# Altium PCB PCB1.PcbDoc
Units mm, origin at the board's own origin, x right, y up, seen from the top; angles counter-clockwise.
Board outline 99.31 x 102 mm, 2 copper layers (Top Layer, Bottom Layer); 134 components, 14 nets, 433 pads, 0 vias.
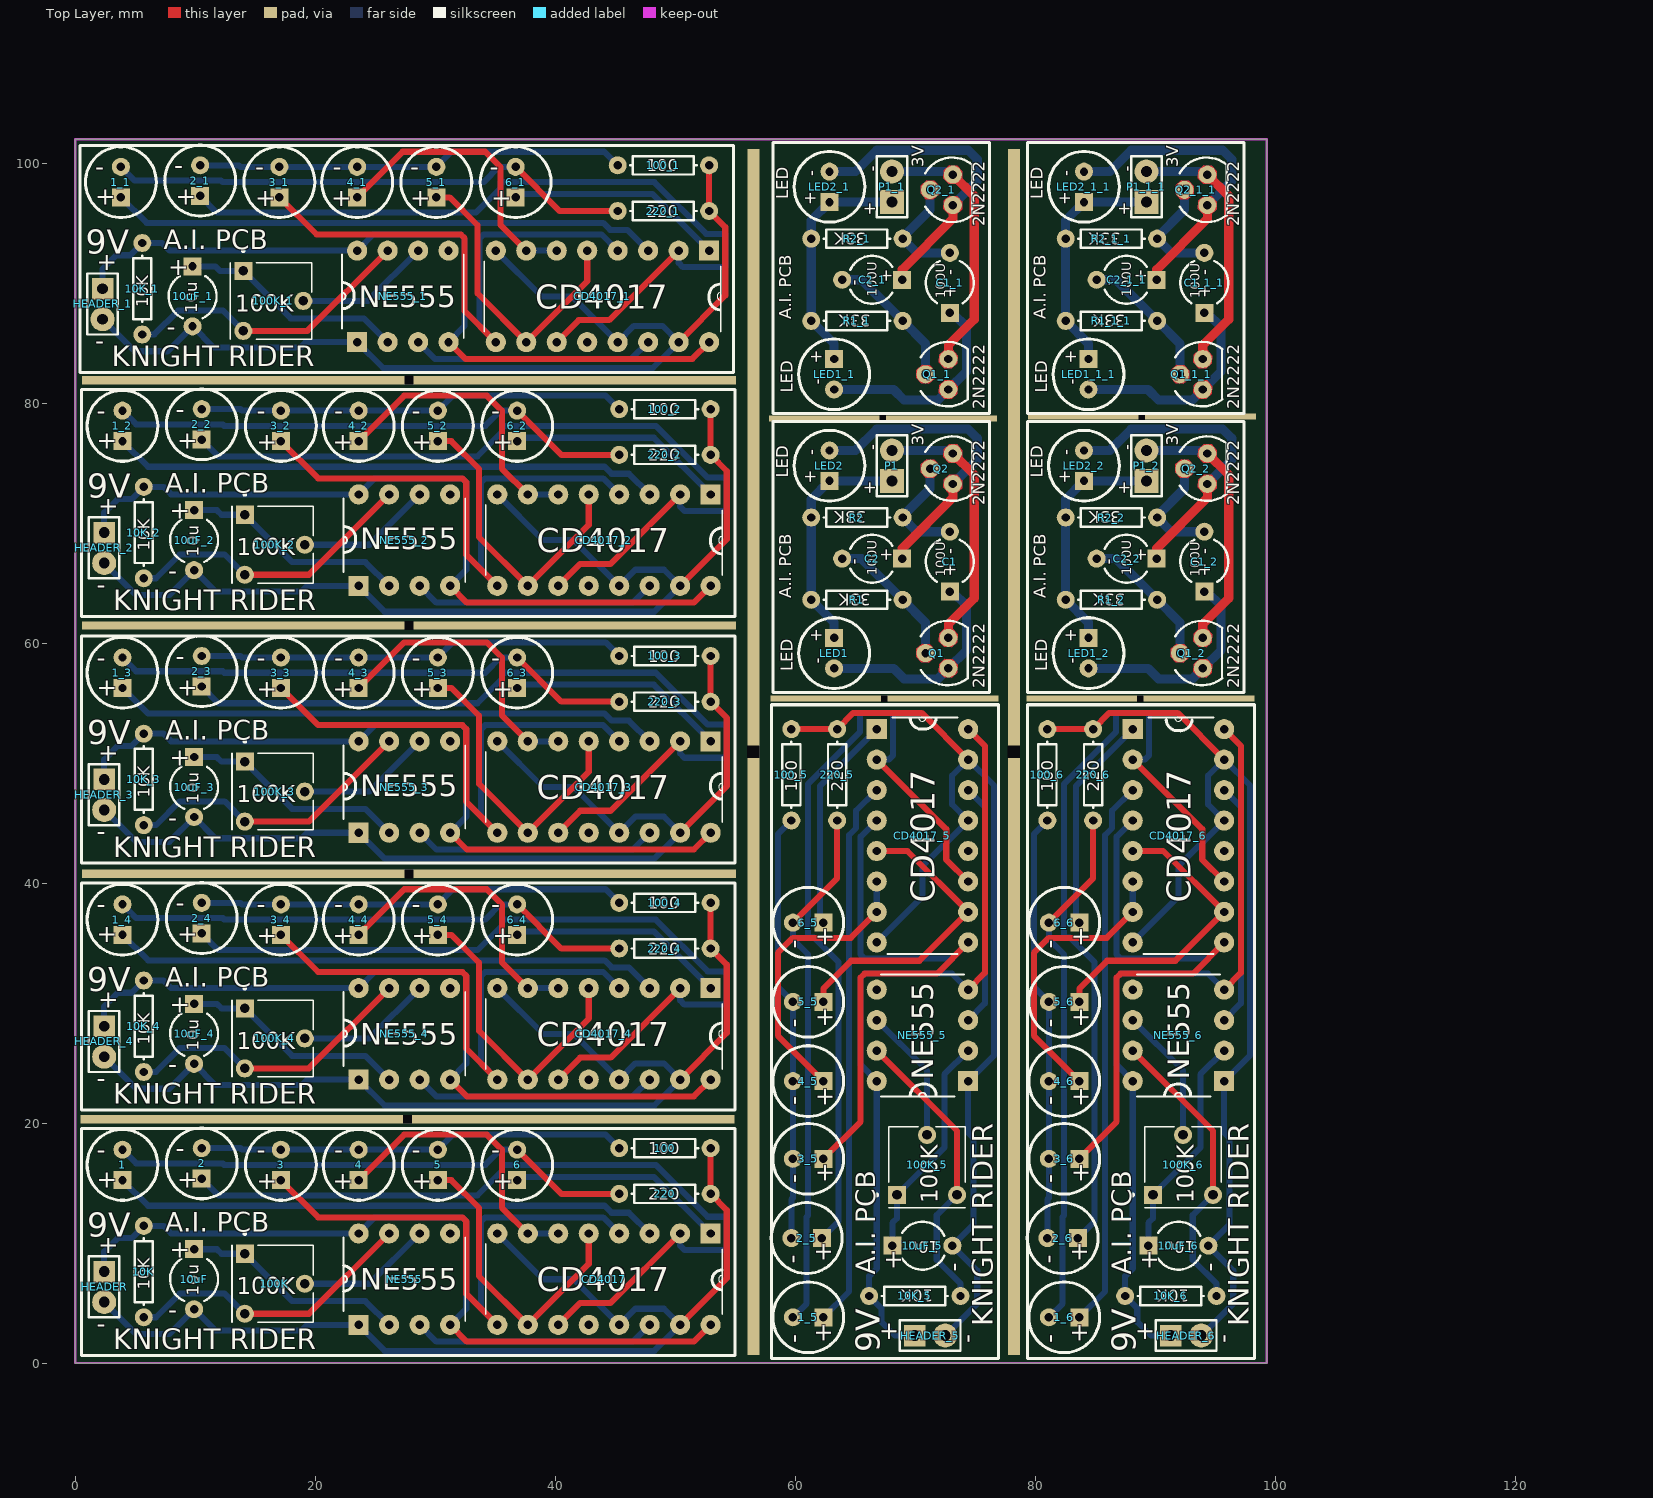
[diagram p0: Top Layer view]
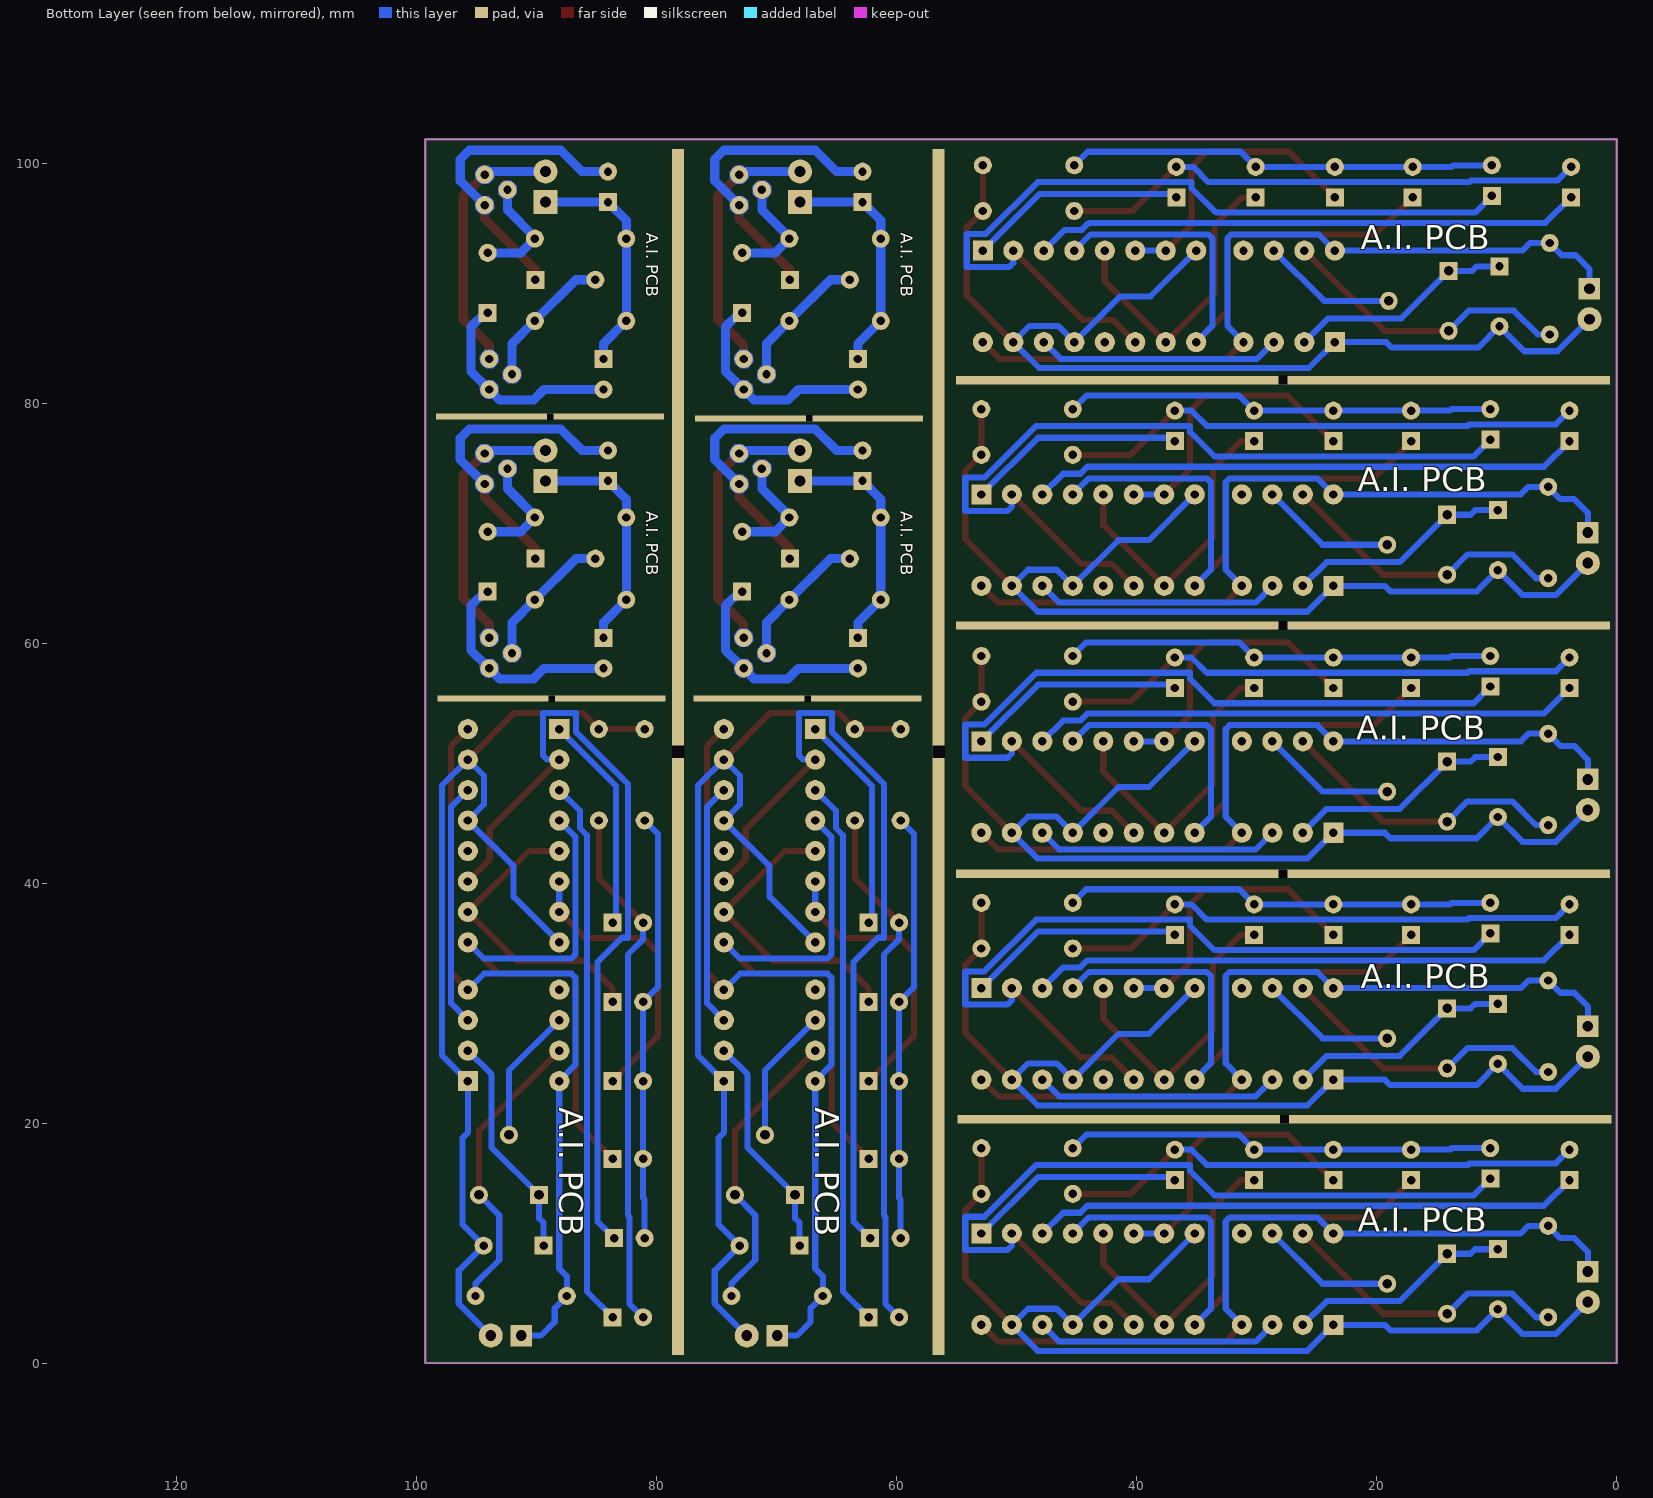
[diagram p1: Bottom Layer view, seen from below]

## Layer stack, top to bottom
Top Solder: solder mask 0.0102, Solder Resist, Dk 3.5
Top Layer: signal copper 0.0356
Dielectric 1: dielectric 0.32, FR-4, Dk 4.8
Bottom Layer: signal copper 0.0356
Bottom Solder: solder mask 0.0102, Solder Resist, Dk 3.5

## Board outline
0,0 0,102 99.314,102 99.314,0

## Design rules (kind name [scope] priority, off if disabled: settings)
Clearance [All] p1: gap=0.254 ignorepadtopadclearanceinfootprint=FALSE except(0: Arc-Hole Track-Hole SMDPad-Hole THPad-Hole Via-Hole Fill-Hole Poly-Hole Region-Hole Text-Hole)
PolygonConnect [All] p1: connectstyle=Relief reliefconductorwidth=0.254 reliefentries=4 polygonreliefangle="90 Angle" airgapwidth=0.254
RoutingVias [All] p1: holewidth=0.711 width=1.27 viastyle="Through Hole" minholewidth=0.711 minwidth=1.27 maxholewidth=0.711 maxwidth=1.27
SolderMaskExpansion [All] p1: expansion=0.102
Width [All] p1: maxlimit=0.762 minlimit=0.254 preferedwidth=0.508
30 further rules are at their usual default settings.

## Classes and differential pairs
component class Sheet1: 1 2 3 4 5 6 10K 10uF 100 100K 220 CD4017 HEADER NE555

## Components (designator, comment, footprint, x,y, rotation, side; value= is the part's Value field where it differs from the comment)
1 "L-53GD" L-53GD 3.937,16.51 r90 top
1_1 "L-53GD" L-53GD 3.81,98.425 r90 top (schematic designator 1)
1_2 "L-53GD" L-53GD 3.937,78.105 r90 top (schematic designator 1)
1_3 "L-53GD" L-53GD 3.937,57.531 r90 top (schematic designator 1)
1_4 "L-53GD" L-53GD 3.937,36.957 r90 top (schematic designator 1)
1_5 "L-53GD" L-53GD 61.087,3.81 r180 top (schematic designator 1)
1_6 "L-53GD" L-53GD 82.423,3.81 r180 top (schematic designator 1)
2 "L-53GD" L-53GD 10.541,16.637 r90 top
2_1 "L-53GD" L-53GD 10.414,98.552 r90 top (schematic designator 2)
2_2 "L-53GD" L-53GD 10.541,78.232 r90 top (schematic designator 2)
2_3 "L-53GD" L-53GD 10.541,57.658 r90 top (schematic designator 2)
2_4 "L-53GD" L-53GD 10.541,37.084 r90 top (schematic designator 2)
2_5 "L-53GD" L-53GD 60.96,10.414 r180 top (schematic designator 2)
2_6 "L-53GD" L-53GD 82.296,10.414 r180 top (schematic designator 2)
3 "L-53GD" L-53GD 17.145,16.51 r90 top
3_1 "L-53GD" L-53GD 17.018,98.425 r90 top (schematic designator 3)
3_2 "L-53GD" L-53GD 17.145,78.105 r90 top (schematic designator 3)
3_3 "L-53GD" L-53GD 17.145,57.531 r90 top (schematic designator 3)
3_4 "L-53GD" L-53GD 17.145,36.957 r90 top (schematic designator 3)
3_5 "L-53GD" L-53GD 61.087,17.018 r180 top (schematic designator 3)
3_6 "L-53GD" L-53GD 82.423,17.018 r180 top (schematic designator 3)
4 "L-53GD" L-53GD 23.622,16.51 r90 top
4_1 "L-53GD" L-53GD 23.495,98.425 r90 top (schematic designator 4)
4_2 "L-53GD" L-53GD 23.622,78.105 r90 top (schematic designator 4)
4_3 "L-53GD" L-53GD 23.622,57.531 r90 top (schematic designator 4)
4_4 "L-53GD" L-53GD 23.622,36.957 r90 top (schematic designator 4)
4_5 "L-53GD" L-53GD 61.087,23.495 r180 top (schematic designator 4)
4_6 "L-53GD" L-53GD 82.423,23.495 r180 top (schematic designator 4)
5 "L-53GD" L-53GD 30.226,16.51 r90 top
5_1 "L-53GD" L-53GD 30.099,98.425 r90 top (schematic designator 5)
5_2 "L-53GD" L-53GD 30.226,78.105 r90 top (schematic designator 5)
5_3 "L-53GD" L-53GD 30.226,57.531 r90 top (schematic designator 5)
5_4 "L-53GD" L-53GD 30.226,36.957 r90 top (schematic designator 5)
5_5 "L-53GD" L-53GD 61.087,30.099 r180 top (schematic designator 5)
5_6 "L-53GD" L-53GD 82.423,30.099 r180 top (schematic designator 5)
6 "L-53GD" L-53GD 36.83,16.51 r90 top
6_1 "L-53GD" L-53GD 36.703,98.425 r90 top (schematic designator 6)
6_2 "L-53GD" L-53GD 36.83,78.105 r90 top (schematic designator 6)
6_3 "L-53GD" L-53GD 36.83,57.531 r90 top (schematic designator 6)
6_4 "L-53GD" L-53GD 36.83,36.957 r90 top (schematic designator 6)
6_5 "L-53GD" L-53GD 61.087,36.703 r180 top (schematic designator 6)
6_6 "L-53GD" L-53GD 82.423,36.703 r180 top (schematic designator 6)
10K "Res1" AXIAL-0.3 5.715,7.62 r90 top value=1K
10K_1 "Res1" AXIAL-0.3 5.588,89.535 r90 top value=1K (schematic designator 10K)
10K_2 "Res1" AXIAL-0.3 5.715,69.215 r90 top value=1K (schematic designator 10K)
10K_3 "Res1" AXIAL-0.3 5.715,48.641 r90 top value=1K (schematic designator 10K)
10K_4 "Res1" AXIAL-0.3 5.715,28.067 r90 top value=1K (schematic designator 10K)
10K_5 "Res1" AXIAL-0.3 69.977,5.588 r180 top value=1K (schematic designator 10K)
10K_6 "Res1" AXIAL-0.3 91.313,5.588 r180 top value=1K (schematic designator 10K)
10uF "Cap2" CAPR5-4X5 9.906,6.985 r270 top value=10uF
10uF_1 "Cap2" CAPR5-4X5 9.779,88.9 r270 top value=10uF (schematic designator 10uF)
10uF_2 "Cap2" CAPR5-4X5 9.906,68.58 r270 top value=10uF (schematic designator 10uF)
10uF_3 "Cap2" CAPR5-4X5 9.906,48.006 r270 top value=10uF (schematic designator 10uF)
10uF_4 "Cap2" CAPR5-4X5 9.906,27.432 r270 top value=10uF (schematic designator 10uF)
10uF_5 "Cap2" CAPR5-4X5 70.612,9.779 r0 top value=10uF (schematic designator 10uF)
10uF_6 "Cap2" CAPR5-4X5 91.948,9.779 r0 top value=10uF (schematic designator 10uF)
100 "Res1" AXIAL-0.3 49.149,17.907 r180 top value=1K
100_1 "Res1" AXIAL-0.3 49.022,99.822 r180 top value=1K (schematic designator 100)
100_2 "Res1" AXIAL-0.3 49.149,79.502 r180 top value=1K (schematic designator 100)
100_3 "Res1" AXIAL-0.3 49.149,58.928 r180 top value=1K (schematic designator 100)
100_4 "Res1" AXIAL-0.3 49.149,38.354 r180 top value=1K (schematic designator 100)
100_5 "Res1" AXIAL-0.3 59.69,49.022 r270 top value=1K (schematic designator 100)
100_6 "Res1" AXIAL-0.3 81.026,49.022 r270 top value=1K (schematic designator 100)
100K "EVN-D8AA03B14" *TRIM_EVN-D8AA03B14 16.637,6.604 r270 top
100K_1 "EVN-D8AA03B14" *TRIM_EVN-D8AA03B14 16.51,88.519 r270 top (schematic designator 100K)
100K_2 "EVN-D8AA03B14" *TRIM_EVN-D8AA03B14 16.637,68.199 r270 top (schematic designator 100K)
100K_3 "EVN-D8AA03B14" *TRIM_EVN-D8AA03B14 16.637,47.625 r270 top (schematic designator 100K)
100K_4 "EVN-D8AA03B14" *TRIM_EVN-D8AA03B14 16.637,27.051 r270 top (schematic designator 100K)
100K_5 "EVN-D8AA03B14" *TRIM_EVN-D8AA03B14 70.993,16.51 r0 top (schematic designator 100K)
100K_6 "EVN-D8AA03B14" *TRIM_EVN-D8AA03B14 92.329,16.51 r0 top (schematic designator 100K)
220 "Res1" AXIAL-0.3 49.149,14.097 r180 top value=1K
220_1 "Res1" AXIAL-0.3 49.022,96.012 r180 top value=1K (schematic designator 220)
220_2 "Res1" AXIAL-0.3 49.149,75.692 r180 top value=1K (schematic designator 220)
220_3 "Res1" AXIAL-0.3 49.149,55.118 r180 top value=1K (schematic designator 220)
220_4 "Res1" AXIAL-0.3 49.149,34.544 r180 top value=1K (schematic designator 220)
220_5 "Res1" AXIAL-0.3 63.5,49.022 r270 top value=1K (schematic designator 220)
220_6 "Res1" AXIAL-0.3 84.836,49.022 r270 top value=1K (schematic designator 220)
C1 "Cap1" CAPR5-4X5 72.898,66.786 r90 top value=100uF
C1_1 "Cap1" CAPR5-4X5 72.898,90.027 r90 top value=100uF (schematic designator C1)
C1_1_1 "Cap1" CAPR5-4X5 94.107,90.027 r90 top value=100uF (schematic designator C1)
C1_2 "Cap1" CAPR5-4X5 94.107,66.786 r90 top value=100uF (schematic designator C1)
C2 "Cap2" CAPR5-4X5 66.421,67.04 r180 top value=100uF
C2_1 "Cap2" CAPR5-4X5 66.421,90.281 r180 top value=100uF (schematic designator C2)
C2_1_1 "Cap2" CAPR5-4X5 87.63,90.281 r180 top value=100uF (schematic designator C2)
C2_2 "Cap2" CAPR5-4X5 87.63,67.04 r180 top value=100uF (schematic designator C2)
CD4017 "CD4017BE" *DIP254P762X508-16 35.179,3.175 r270 top
CD4017_1 "CD4017BE" *DIP254P762X508-16 35.052,85.09 r270 top (schematic designator CD4017)
CD4017_2 "CD4017BE" *DIP254P762X508-16 35.179,64.77 r270 top (schematic designator CD4017)
CD4017_3 "CD4017BE" *DIP254P762X508-16 35.179,44.196 r270 top (schematic designator CD4017)
CD4017_4 "CD4017BE" *DIP254P762X508-16 35.179,23.622 r270 top (schematic designator CD4017)
CD4017_5 "CD4017BE" *DIP254P762X508-16 74.422,35.052 r0 top (schematic designator CD4017)
CD4017_6 "CD4017BE" *DIP254P762X508-16 95.758,35.052 r0 top (schematic designator CD4017)
HEADER "Header 2" HDR1X2#1 2.413,7.62 r270 top
HEADER_1 "Header 2" HDR1X2#1 2.286,89.535 r270 top (schematic designator HEADER)
HEADER_2 "Header 2" HDR1X2#1 2.413,69.215 r270 top (schematic designator HEADER)
HEADER_3 "Header 2" HDR1X2#1 2.413,48.641 r270 top (schematic designator HEADER)
HEADER_4 "Header 2" HDR1X2#1 2.413,28.067 r270 top (schematic designator HEADER)
HEADER_5 "Header 2" HDR1X2#1 69.977,2.286 r0 top (schematic designator HEADER)
HEADER_6 "Header 2" HDR1X2#1 91.313,2.286 r0 top (schematic designator HEADER)
LED1 "L-53GD" L-53GD 63.246,59.166 r270 top
LED1_1 "L-53GD" L-53GD 63.246,82.407 r270 top (schematic designator LED1)
LED1_1_1 "L-53GD" L-53GD 84.455,82.407 r270 top (schematic designator LED1)
LED1_2 "L-53GD" L-53GD 84.455,59.166 r270 top (schematic designator LED1)
LED2 "L-53GD" L-53GD 62.865,74.787 r90 top
LED2_1 "L-53GD" L-53GD 62.865,98.028 r90 top (schematic designator LED2)
LED2_1_1 "L-53GD" L-53GD 84.074,98.028 r90 top (schematic designator LED2)
LED2_2 "L-53GD" L-53GD 84.074,74.787 r90 top (schematic designator LED2)
NE555 "NE555N" *DIP254P762X533-8 31.242,10.795 r90 top
NE555_1 "NE555N" *DIP254P762X533-8 31.115,92.71 r90 top (schematic designator NE555)
NE555_2 "NE555N" *DIP254P762X533-8 31.242,72.39 r90 top (schematic designator NE555)
NE555_3 "NE555N" *DIP254P762X533-8 31.242,51.816 r90 top (schematic designator NE555)
NE555_4 "NE555N" *DIP254P762X533-8 31.242,31.242 r90 top (schematic designator NE555)
NE555_5 "NE555N" *DIP254P762X533-8 66.802,31.115 r180 top (schematic designator NE555)
NE555_6 "NE555N" *DIP254P762X533-8 88.138,31.115 r180 top (schematic designator NE555)
P1 "Header 2" HDR1X2#2 68.072,73.517 r90 top
P1_1 "Header 2" HDR1X2#2 68.072,96.758 r90 top (schematic designator P1)
P1_1_1 "Header 2" HDR1X2#2 89.281,96.758 r90 top (schematic designator P1)
P1_2 "Header 2" HDR1X2#2 89.281,73.517 r90 top (schematic designator P1)
Q1 "P2N2222A" *TO92 72.771,59.166 r90 top
Q1_1 "P2N2222A" *TO92 72.771,82.407 r90 top (schematic designator Q1)
Q1_1_1 "P2N2222A" *TO92 93.98,82.407 r90 top (schematic designator Q1)
Q1_2 "P2N2222A" *TO92 93.98,59.166 r90 top (schematic designator Q1)
Q2 "P2N2222A" *TO92 73.152,74.533 r90 top
Q2_1 "P2N2222A" *TO92 73.152,97.774 r90 top (schematic designator Q2)
Q2_1_1 "P2N2222A" *TO92 94.361,97.774 r90 top (schematic designator Q2)
Q2_2 "P2N2222A" *TO92 94.361,74.533 r90 top (schematic designator Q2)
R1 "Res1" AXIAL-0.3 65.151,63.611 r180 top value=33K
R1_1 "Res1" AXIAL-0.3 65.151,86.852 r180 top value=33K (schematic designator R1)
R1_1_1 "Res1" AXIAL-0.3 86.36,86.852 r180 top value=33K (schematic designator R1)
R1_2 "Res1" AXIAL-0.3 86.36,63.611 r180 top value=33K (schematic designator R1)
R2 "Res1" AXIAL-0.3 65.151,70.469 r180 top value=33K
R2_1 "Res1" AXIAL-0.3 65.151,93.71 r180 top value=33K (schematic designator R2)
R2_1_1 "Res1" AXIAL-0.3 86.36,93.71 r180 top value=33K (schematic designator R2)
R2_2 "Res1" AXIAL-0.3 86.36,70.469 r180 top value=33K (schematic designator R2)

## Footprints (in the part's own frame and the unit in brackets; to place one, negate y for a bottom-side part, rotate by r counter-clockwise, add the part's x,y. Pads: shape width x height; smd on the part's side, far side on the other; paste and mask are expansions set on the pad)
*DIP254P762X508-16 [mil]
  rect 66x66 hole 27.56: 1(-300,700)
  round 66 hole 27.56: 2(-300,600) 3(-300,500) 4(-300,400) 5(-300,300) 6(-300,200) 7(-300,100) 8(-300,0) 9(0,0) 10(0,100) 11(0,200) 12(0,300) 13(0,400) 14(0,500) 15(0,600) 16(0,700)
  silkscreen extent -265,-38 -35,738
*DIP254P762X533-8 [mil]
  rect 66x66 hole 27.56: 1(-300,300)
  round 66 hole 27.56: 2(-300,200) 3(-300,100) 4(-300,0) 5(0,0) 6(0,100) 7(0,200) 8(0,300)
  silkscreen extent -287,-50 -13,350
*TO92 [mm]
  round 1.5 hole 0.7: 1(1.27,0) 2(0,1.905) 3(-1.27,0)
  Top Layer region: -0.482,0.287 -0.916,0.76 -1.557,0.788 -2.03,0.354 -2.058,-0.287 -1.624,-0.76 -0.983,-0.788 -0.51,-0.354
  Top Layer region: 0.788,2.192 0.354,2.665 -0.287,2.693 -0.76,2.259 -0.788,1.618 -0.354,1.145 0.287,1.117 0.76,1.551
  Top Layer region: 2.058,0.287 1.624,0.76 0.983,0.788 0.51,0.354 0.482,-0.287 0.916,-0.76 1.557,-0.788 2.03,-0.354
  Bottom Layer region: -0.482,0.287 -0.916,0.76 -1.557,0.788 -2.03,0.354 -2.058,-0.287 -1.624,-0.76 -0.983,-0.788 -0.51,-0.354
  Bottom Layer region: 0.788,2.192 0.354,2.665 -0.287,2.693 -0.76,2.259 -0.788,1.618 -0.354,1.145 0.287,1.117 0.76,1.551
  Bottom Layer region: 2.058,0.287 1.624,0.76 0.983,0.788 0.51,0.354 0.482,-0.287 0.916,-0.76 1.557,-0.788 2.03,-0.354
  Multi-Layer region: -0.482,0.287 -0.916,0.76 -1.557,0.788 -2.03,0.354 -2.058,-0.287 -1.624,-0.76 -0.983,-0.788 -0.51,-0.354
  Multi-Layer region: 0.788,2.192 0.354,2.665 -0.287,2.693 -0.76,2.259 -0.788,1.618 -0.354,1.145 0.287,1.117 0.76,1.551
  Multi-Layer region: 2.058,0.287 1.624,0.76 0.983,0.788 0.51,0.354 0.482,-0.287 0.916,-0.76 1.557,-0.788 2.03,-0.354
  silkscreen extent -2.68,-1.61 2.7,2.3
*TRIM_EVN-D8AA03B14 [mm]
  rect 1.508x1.508 hole 0.8: 1(-2.5,-2.5)
  round 1.508 hole 0.8: 2(0,2.5) 3(2.5,-2.5)
  silkscreen extent -4.3,-3.57 3.2,3.2
AXIAL-0.3 [mm] "Axial Device, Thru-Hole; 2 Leads; 0.3 in Pin Spacing"
  round 1.5 hole 0.7: 1(-3.81,0) 2(3.81,0)
  silkscreen extent -2.77,-0.76 2.77,0.76
CAPR5-4X5 [mm] "Capacitor; 2 Leads"
  rect 1.5x1.5 hole 0.7: 1(-2.5,0)
  round 1.5 hole 0.7: 2(2.5,0)
  silkscreen extent -1.69,-2 1.82,2
HDR1X2#1 [mm] "Connector; Header; 2 Position"
  rect 1.8x1.8 hole 0.9: 1(0,0)
  round 2 hole 0.9: 2(2.54,0)
  silkscreen extent -1.27,-1.27 3.81,1.27
HDR1X2#2 [mm] "Connector; Header; 2 Position"
  rect 2x2 hole 0.9: 1(0,0)
  round 2 hole 0.9: 2(2.54,0)
  silkscreen extent -1.27,-1.27 3.81,1.27
L-53GD [mm]
  rect 1.5x1.5 hole 0.7: 1(-1.27,0)
  round 1.5 hole 0.7: 2(1.27,0)
  silkscreen extent -2.95,-2.95 2.95,2.95

## Part data
1 1_1 1_2 1_3 1_4 1_5 1_6 2 2_1 2_2 2_3 2_4 2_5 2_6 3 3_1 3_2 3_3 3_4 3_5 3_6 4 4_1 4_2 4_3 4_4 4_5 4_6 5 5_1 5_2 5_3 5_4 5_5 5_6 6 6_1 6_2 6_3 6_4 6_5 6_6 LED1 LED1_1 LED1_1_1 LED1_2 LED2 LED2_1 LED2_1_1 LED2_2: "LED", Manufacturer_Name=Kingbright, Mouser Part Number=N/A, RS Part Number=2286004A, Allied_Number=70424261, Allied Price/Stock=http://www.alliedelec.com/kingbright-l-53gd/70424261/, Datasheet Link=http://docs-emea.rs-online.com/webdocs/151e/0900766b8151e408.pdf, Manufacturer_Part_Number=L-53GD, Mouser Price/Stock=https://www.mouser.com/Search/Refine.aspx?Keyword=N%2FA, RS Price/Stock=http://uk.rs-online.com/web/p/products/2286004A
10K 10K_1 10K_2 10K_3 10K_4 10K_5 10K_6 100 100_1 100_2 100_3 100_4 100_5 100_6 220 220_1 220_2 220_3 220_4 220_5 220_6 R1 R1_1 R1_1_1 R1_2 R2 R2_1 R2_1_1 R2_2: "Resistor", LatestRevisionDate=17-Jul-2002, LatestRevisionNote="Re-released for DXP Platform.", PackageDescription="Axial Device, Thru-Hole; 2 Leads; 0.3 in Pin Spacing", PackageReference=AXIAL-0.3, Published=8-Jun-2000, Publisher="Altium Limited"
10uF 10uF_1 10uF_2 10uF_3 10uF_4 10uF_5 10uF_6 C2 C2_1 C2_1_1 C2_2: "Capacitor", PackageDescription="Capacitor; 2 Leads", PackageReference=CAPR5-4X5, Published=23-Sep-2002, Publisher="Altium Limited"
100K 100K_1 100K_2 100K_3 100K_4 100K_5 100K_6: "Trimmer; Carbon; Rest 10 Kilohms; PCB; 1 Turn; Pwr-Rtg 0.1 W; Linear; Top Adj; 6 mm SQ", Package="PQFP-44 Panasonic", Availability=Unavailable, MF="Panasonic Electronic", MP=EVN-D8AA03B14, Price=None, SnapEDA_Link=https://www.snapeda.com/parts/EVN-D8AA03B14/Panasonic%20Electronic%20Components/view-part/?ref=snap
C1 C1_1 C1_1_1 C1_2: library part Cap2, "Capacitor", PackageDescription="Capacitor; 2 Leads", PackageReference=CAPR5-4X5, Published=23-Sep-2002, Publisher="Altium Limited"
CD4017 CD4017_1 CD4017_2 CD4017_3 CD4017_4 CD4017_5 CD4017_6: "IC Mos 4017/CD4017BE HARRIS", Package="DIP-16 Intersil", Availability=Unavailable, MF=Texas, MP=CD4017BE, Price=None, SnapEDA_Link=https://www.snapeda.com/parts/CD4017BE/Texas%20Instruments/view-part/?ref=snap
HEADER HEADER_1 HEADER_2 HEADER_3 HEADER_4 HEADER_5 HEADER_6 P1 P1_1 P1_1_1 P1_2: "Header, 2-Pin", LatestRevisionDate=17-Jul-2002, LatestRevisionNote="Re-released for DXP Platform.", Publisher="Altium Limited"
NE555 NE555_1 NE555_2 NE555_3 NE555_4 NE555_5 NE555_6: Package="DIP-8 Texas Instruments", Availability=Unavailable, MF="ON Semiconductor", MP=NE555N, Price=None, SnapEDA_Link=https://www.snapeda.com/parts/NE555N/ON%20Semiconductor/view-part/?ref=snap
Q1 Q1_1 Q1_1_1 Q1_2 Q2 Q2_1 Q2_1_1 Q2_2: Package="TO-92 NXP Semiconductors", Availability=Unavailable, MF="ON Semiconductor", MP=P2N2222A, Price=None, SnapEDA_Link=https://www.snapeda.com/parts/P2N2222A/ON%20Semiconductor/view-part/?ref=snap

## Free pads (board coordinates)
  rect 1x100.5 hole 1 square: 3(56.515,50.927) 3(78.232,50.927)
  rect 54.5x0.7 hole 0.7 square: 4(27.686,20.32) 4(27.813,40.767) 4(27.813,61.468) 4(27.813,81.915)
  rect 19x0.5 hole 0.5 square: 5(67.31,78.74) 5(67.437,55.372) 5(88.773,55.372) 5(88.9,78.867)

## Nets (pads, with @x,y where several pads share a name; then routed paths per layer and width w, separated by ;. In a path a pad name is that pad's centre, name@x,y a point inside that pad or via, vN(x,y) a via of type N, cw(c..) or ccw(c..) an arc to the next point about the centre after c; other vN are vias at no path point)
Net1_1: 1.1 CD4017.3 | length 45.8
  Bottom Layer w0.508: 1.1 6.071,13.106 44.12,13.106 44.704,12.522 46.152,12.522 CD4017.3
Net1_2: 1.2 6.2 220.2 | length 44
  Top Layer w0.508: 6.2 40.513,14.097 220.2
  Bottom Layer w0.508: 1.2 5.08,16.637 12.294,16.637 12.421,16.51 34.175,16.51 35.445,17.78 6.2
Net2_1: 2.1 CD4017.2 CD4017.11 | length 68.6
  Top Layer w0.508: CD4017.11 42.088,5.004 44.628,5.004 CD4017.2
  Bottom Layer w0.508: 2.1 11.938,13.97 33.528,13.97 35.572,16.014 35.572,16.51 48.387,16.51 52.705,12.192 54.305,12.192 54.305,9.423 50.775,9.423 50.419,9.779 CD4017.2
Net2_2: 2.2 3.2 4.2 5.2 100.2 | length 35.8
  Bottom Layer w0.508: 2.2 13.767,17.907 13.894,17.78 3.2 4.2 5.2 31.484,19.038 44.208,19.038 100.2
Net3_1: 3.1 CD4017.4 CD4017.9 | length 48
  Top Layer w0.508: 3.1 20.244,12.141 32.258,12.141 32.588,11.811 32.588,5.766 CD4017.9
  Bottom Layer w0.508: CD4017.9 33.833,4.521 33.833,11.811 34.163,12.141 43.993,12.141 CD4017.4
Net4_1: 4.1 CD4017.6 CD4017.7 | length 24.5
  Top Layer w0.508: 4.1 27.42,19.038 34.302,19.038 35.56,17.78 35.56,12.954 CD4017.7
  Bottom Layer w0.508: CD4017.7 CD4017.6
Net5_1: 5.1 CD4017.5 CD4017.10 | length 25.5
  Top Layer w0.508: 5.1 31.338,15.24 33.655,12.923 33.655,7.239 CD4017.10 42.799,8.255 CD4017.5
Net6_1: 6.1 CD4017.1 | length 18.2
  Bottom Layer w0.508: 6.1 37.109,15.519 48.235,15.519 CD4017.1
Net10K_1: 10K.1 100K.3 NE555.7 | length 24.7
  Top Layer w0.508: 100K.3 19.471,4.104 NE555.7
  Bottom Layer w0.508: 10K.1 6.731,3.81 8.712,5.791 12.45,5.791 100K.3
Net10K_2: 10K.2 CD4017.16 HEADER.1 NE555.4 NE555.8 | length 65.7
  Top Layer w0.508: NE555.4 32.639,1.778 51.562,1.778 CD4017.16
  Bottom Layer w0.508: HEADER.1 2.413,9.271 3.556,10.414 4.699,10.414 10K.2 7.366,11.43 8.001,10.795 NE555.8 24.968,12.141 32.258,12.141 32.588,11.811 32.588,4.521 NE555.4
Net10uF_1: 10uF.1 100K.1 NE555.2 | length 18.9
  Bottom Layer w0.508: 10uF.1 11.811,9.485 12.192,9.104 100K.1 18.085,5.156 24.181,5.156 NE555.2
Net10uF_2: 10uF.2 100.1 220.1 CD4017.8 CD4017.13 CD4017.15 HEADER.2 NE555.1 | length 89.1
  Top Layer w0.508: CD4017.15 54.305,7.061 54.305,12.751 220.1 100.1
  Bottom Layer w0.508: HEADER.2 5.08,2.413 7.834,2.413 10uF.2 11.673,2.718 18.872,2.718 19.329,3.175 NE555.1 25.781,1.016 48.26,1.016 CD4017.15 49.073,4.521 46.685,4.521 CD4017.13 41.529,6.985 38.989,6.985 CD4017.8
Net100K_2: 100K.2 NE555.6 | length 11.3
  Bottom Layer w0.508: 100K.2 24.511,6.604 NE555.6
NetCD4017_14: CD4017.14 NE555.3 | length 20.3
  Bottom Layer w0.508: NE555.3 30.099,1.778 46.482,1.778 CD4017.14
pads on no net: 1_1.1 1_1.2 1_2.1 1_2.2 1_3.1 1_3.2 1_4.1 1_4.2 1_5.1 1_5.2 1_6.1 1_6.2 2_1.1 2_1.2 2_2.1 2_2.2 2_3.1 2_3.2 2_4.1 2_4.2 2_5.1 2_5.2 2_6.1 2_6.2 3_1.1 3_1.2 3_2.1 3_2.2 3_3.1 3_3.2 3_4.1 3_4.2 3_5.1 3_5.2 3_6.1 3_6.2 4_1.1 4_1.2 4_2.1 4_2.2 4_3.1 4_3.2 4_4.1 4_4.2 4_5.1 4_5.2 4_6.1 4_6.2 5_1.1 5_1.2 5_2.1 5_2.2 5_3.1 5_3.2 5_4.1 5_4.2 5_5.1 5_5.2 5_6.1 5_6.2 6_1.1 6_1.2 6_2.1 6_2.2 6_3.1 6_3.2 6_4.1 6_4.2 6_5.1 6_5.2 6_6.1 6_6.2 10K_1.1 10K_1.2 10K_2.1 10K_2.2 10K_3.1 10K_3.2 10K_4.1 10K_4.2 10K_5.1 10K_5.2 10K_6.1 10K_6.2 10uF_1.1 10uF_1.2 10uF_2.1 10uF_2.2 10uF_3.1 10uF_3.2 10uF_4.1 10uF_4.2 10uF_5.1 10uF_5.2 10uF_6.1 10uF_6.2 100_1.1 100_1.2 100_2.1 100_2.2 100_3.1 100_3.2 100_4.1 100_4.2 100_5.1 100_5.2 100_6.1 100_6.2 100K_1.1 100K_1.2 100K_1.3 100K_2.1 100K_2.2 100K_2.3 100K_3.1 100K_3.2 100K_3.3 100K_4.1 100K_4.2 100K_4.3 100K_5.1 100K_5.2 100K_5.3 100K_6.1 100K_6.2 100K_6.3 220_1.1 220_1.2 220_2.1 220_2.2 220_3.1 220_3.2 220_4.1 220_4.2 220_5.1 220_5.2 220_6.1 220_6.2 C1.1 C1.2 C1_1.1 C1_1.2 C1_1_1.1 C1_1_1.2 C1_2.1 C1_2.2 C2.1 C2.2 C2_1.1 C2_1.2 C2_1_1.1 C2_1_1.2 C2_2.1 C2_2.2 CD4017.12 CD4017_1.1 CD4017_1.2 CD4017_1.3 CD4017_1.4 CD4017_1.5 CD4017_1.6 CD4017_1.7 CD4017_1.8 CD4017_1.9 CD4017_1.10 CD4017_1.11 CD4017_1.12 CD4017_1.13 CD4017_1.14 CD4017_1.15 CD4017_1.16 CD4017_2.1 CD4017_2.2 CD4017_2.3 CD4017_2.4 CD4017_2.5 CD4017_2.6 CD4017_2.7 CD4017_2.8 CD4017_2.9 CD4017_2.10 CD4017_2.11 CD4017_2.12 CD4017_2.13 CD4017_2.14 CD4017_2.15 CD4017_2.16 CD4017_3.1 CD4017_3.2 CD4017_3.3 CD4017_3.4 CD4017_3.5 CD4017_3.6 CD4017_3.7 CD4017_3.8 CD4017_3.9 CD4017_3.10 CD4017_3.11 CD4017_3.12 CD4017_3.13 CD4017_3.14 CD4017_3.15 CD4017_3.16 CD4017_4.1 CD4017_4.2 CD4017_4.3 CD4017_4.4 CD4017_4.5 CD4017_4.6 CD4017_4.7 CD4017_4.8 CD4017_4.9 CD4017_4.10 CD4017_4.11 CD4017_4.12 CD4017_4.13 CD4017_4.14 CD4017_4.15 CD4017_4.16 CD4017_5.1 CD4017_5.2 CD4017_5.3 CD4017_5.4 CD4017_5.5 CD4017_5.6 CD4017_5.7 CD4017_5.8 CD4017_5.9 CD4017_5.10 CD4017_5.11 CD4017_5.12 CD4017_5.13 CD4017_5.14 CD4017_5.15 CD4017_5.16 CD4017_6.1 CD4017_6.2 CD4017_6.3 CD4017_6.4 CD4017_6.5 CD4017_6.6 CD4017_6.7 CD4017_6.8 CD4017_6.9 CD4017_6.10 CD4017_6.11 CD4017_6.12 CD4017_6.13 CD4017_6.14 CD4017_6.15 CD4017_6.16 HEADER_1.1 HEADER_1.2 HEADER_2.1 HEADER_2.2 HEADER_3.1 HEADER_3.2 HEADER_4.1 HEADER_4.2 HEADER_5.1 HEADER_5.2 HEADER_6.1 HEADER_6.2 LED1.1 LED1.2 LED1_1.1 LED1_1.2 LED1_1_1.1 LED1_1_1.2 LED1_2.1 LED1_2.2 LED2.1 LED2.2 LED2_1.1 LED2_1.2 LED2_1_1.1 LED2_1_1.2 LED2_2.1 LED2_2.2 NE555.5 NE555_1.1 NE555_1.2 NE555_1.3 NE555_1.4 NE555_1.5 NE555_1.6 NE555_1.7 NE555_1.8 NE555_2.1 NE555_2.2 NE555_2.3 NE555_2.4 NE555_2.5 NE555_2.6 NE555_2.7 NE555_2.8 NE555_3.1 NE555_3.2 NE555_3.3 NE555_3.4 NE555_3.5 NE555_3.6 NE555_3.7 NE555_3.8 NE555_4.1 NE555_4.2 NE555_4.3 NE555_4.4 NE555_4.5 NE555_4.6 NE555_4.7 NE555_4.8 NE555_5.1 NE555_5.2 NE555_5.3 NE555_5.4 NE555_5.5 NE555_5.6 NE555_5.7 NE555_5.8 NE555_6.1 NE555_6.2 NE555_6.3 NE555_6.4 NE555_6.5 NE555_6.6 NE555_6.7 NE555_6.8 P1.1 P1.2 P1_1.1 P1_1.2 P1_1_1.1 P1_1_1.2 P1_2.1 P1_2.2 Q1.1 Q1.2 Q1.3 Q1_1.1 Q1_1.2 Q1_1.3 Q1_1_1.1 Q1_1_1.2 Q1_1_1.3 Q1_2.1 Q1_2.2 Q1_2.3 Q2.1 Q2.2 Q2.3 Q2_1.1 Q2_1.2 Q2_1.3 Q2_1_1.1 Q2_1_1.2 Q2_1_1.3 Q2_2.1 Q2_2.2 Q2_2.3 R1.1 R1.2 R1_1.1 R1_1.2 R1_1_1.1 R1_1_1.2 R1_2.1 R1_2.2 R2.1 R2.2 R2_1.1 R2_1.2 R2_1_1.1 R2_1_1.2 R2_2.1 R2_2.2
copper on no net: | length 3670.8
  Top Layer w0.508: 14.01,86.019 19.344,86.019 26.035,92.71 ; 14.137,24.551 19.471,24.551 26.162,31.242 ; 14.137,45.125 19.471,45.125 26.162,51.816 ; 14.137,65.699 19.471,65.699 26.162,72.39 ; 17.018,97.155 20.117,94.056 32.131,94.056 32.461,93.726 32.461,87.681 35.052,85.09 ; 17.145,35.687 20.244,32.588 32.258,32.588 32.588,32.258 32.588,26.213 35.179,23.622 ; 17.145,56.261 20.244,53.162 32.258,53.162 32.588,52.832 32.588,46.787 35.179,44.196 ; 17.145,76.835 20.244,73.736 32.258,73.736 32.588,73.406 32.588,67.361 35.179,64.77 ; 23.495,97.155 27.293,100.953 34.175,100.953 35.433,99.695 35.433,94.869 37.592,92.71 ; 23.622,35.687 27.42,39.485 34.302,39.485 35.56,38.227 35.56,33.401 37.719,31.242 ; 23.622,56.261 27.42,60.059 34.302,60.059 35.56,58.801 35.56,53.975 37.719,51.816 ; 23.622,76.835 27.42,80.633 34.302,80.633 35.56,79.375 35.56,74.549 37.719,72.39 ; 30.099,97.155 31.211,97.155 33.528,94.838 33.528,89.154 37.592,85.09 42.672,90.17 42.672,92.71 ; 30.226,35.687 31.338,35.687 33.655,33.37 33.655,27.686 37.719,23.622 42.799,28.702 42.799,31.242 ; 30.226,56.261 31.338,56.261 33.655,53.944 33.655,48.26 37.719,44.196 42.799,49.276 42.799,51.816 ; 30.226,76.835 31.338,76.835 33.655,74.518 33.655,68.834 37.719,64.77 42.799,69.85 42.799,72.39 ; 31.115,85.09 32.512,83.693 51.435,83.693 52.832,85.09 ; 31.242,23.622 32.639,22.225 51.562,22.225 52.959,23.622 ; 31.242,44.196 32.639,42.799 51.562,42.799 52.959,44.196 ; 31.242,64.77 32.639,63.373 51.562,63.373 52.959,64.77 ; 36.703,99.695 40.386,96.012 45.212,96.012 ; 36.83,38.227 40.513,34.544 45.339,34.544 ; 36.83,58.801 40.513,55.118 45.339,55.118 ; 36.83,79.375 40.513,75.692 45.339,75.692 ; 40.132,85.09 41.961,86.919 44.501,86.919 50.292,92.71 ; 40.259,23.622 42.088,25.451 44.628,25.451 50.419,31.242 ; 40.259,44.196 42.088,46.025 44.628,46.025 50.419,51.816 ; 40.259,64.77 42.088,66.599 44.628,66.599 50.419,72.39 ; 50.292,85.09 54.178,88.976 54.178,94.666 52.832,96.012 52.832,99.822 ; 50.419,23.622 54.305,27.508 54.305,33.198 52.959,34.544 52.959,38.354 ; 50.419,44.196 54.305,48.082 54.305,53.772 52.959,55.118 52.959,58.928 ; 50.419,64.77 54.305,68.656 54.305,74.346 52.959,75.692 52.959,79.502 ; 59.69,52.832 63.5,52.832 64.846,54.178 70.536,54.178 74.422,50.292 ; 59.817,36.703 63.5,40.386 63.5,45.212 ; 62.357,17.018 65.456,20.117 65.456,32.131 65.786,32.461 71.831,32.461 74.422,35.052 ; 62.357,23.495 58.559,27.293 58.559,34.175 59.817,35.433 64.643,35.433 66.802,37.592 ; 62.357,30.099 62.357,31.211 64.674,33.528 70.358,33.528 74.422,37.592 69.342,42.672 66.802,42.672 ; 66.802,26.035 73.493,19.344 73.493,14.01 ; 66.802,50.292 72.593,44.501 72.593,41.961 74.422,40.132 ; 74.422,31.115 75.819,32.512 75.819,51.435 74.422,52.832 ; 81.026,52.832 84.836,52.832 86.182,54.178 91.872,54.178 95.758,50.292 ; 81.153,36.703 84.836,40.386 84.836,45.212 ; 83.693,17.018 86.792,20.117 86.792,32.131 87.122,32.461 93.167,32.461 95.758,35.052 ; 83.693,23.495 79.895,27.293 79.895,34.175 81.153,35.433 85.979,35.433 88.138,37.592 ; 83.693,30.099 83.693,31.211 86.01,33.528 91.694,33.528 95.758,37.592 90.678,42.672 88.138,42.672 ; 88.138,26.035 94.829,19.344 94.829,14.01 ; 88.138,50.292 93.929,44.501 93.929,41.961 95.758,40.132 ; 95.758,31.115 97.155,32.512 97.155,51.435 95.758,52.832
  Top Layer w0.762: 68.921,67.04 68.921,67.889 73.152,72.12 73.152,73.263 ; 68.921,90.281 68.921,91.13 73.152,95.361 73.152,96.504 ; 72.771,60.436 72.771,61.579 74.93,63.738 74.93,74.025 73.152,75.803 ; 72.771,83.677 72.771,84.82 74.93,86.979 74.93,97.266 73.152,99.044 ; 90.13,67.04 90.13,67.889 94.361,72.12 94.361,73.263 ; 90.13,90.281 90.13,91.13 94.361,95.361 94.361,96.504 ; 93.98,60.436 93.98,61.579 96.139,63.738 96.139,74.025 94.361,75.803 ; 93.98,83.677 93.98,84.82 96.139,86.979 96.139,97.266 94.361,99.044
  Bottom Layer w0.508: 2.286,86.995 4.953,84.328 7.707,84.328 9.779,86.4 11.546,84.633 18.745,84.633 19.202,85.09 23.495,85.09 25.654,82.931 48.133,82.931 50.292,85.09 48.946,86.436 46.558,86.436 45.212,85.09 41.402,88.9 38.862,88.9 35.052,92.71 ; 2.286,89.535 2.286,91.186 3.429,92.329 4.572,92.329 5.588,93.345 7.239,93.345 7.874,92.71 23.495,92.71 24.841,94.056 32.131,94.056 32.461,93.726 32.461,86.436 31.115,85.09 ; 2.413,25.527 5.08,22.86 7.834,22.86 9.906,24.932 11.673,23.165 18.872,23.165 19.329,23.622 23.622,23.622 25.781,21.463 48.26,21.463 50.419,23.622 49.073,24.968 46.685,24.968 45.339,23.622 41.529,27.432 38.989,27.432 35.179,31.242 ; 2.413,28.067 2.413,29.718 3.556,30.861 4.699,30.861 5.715,31.877 7.366,31.877 8.001,31.242 23.622,31.242 24.968,32.588 32.258,32.588 32.588,32.258 32.588,24.968 31.242,23.622 ; 2.413,46.101 5.08,43.434 7.834,43.434 9.906,45.506 11.673,43.739 18.872,43.739 19.329,44.196 23.622,44.196 25.781,42.037 48.26,42.037 50.419,44.196 49.073,45.542 46.685,45.542 45.339,44.196 41.529,48.006 38.989,48.006 35.179,51.816 ; 2.413,48.641 2.413,50.292 3.556,51.435 4.699,51.435 5.715,52.451 7.366,52.451 8.001,51.816 23.622,51.816 24.968,53.162 32.258,53.162 32.588,52.832 32.588,45.542 31.242,44.196 ; 2.413,66.675 5.08,64.008 7.834,64.008 9.906,66.08 11.673,64.313 18.872,64.313 19.329,64.77 23.622,64.77 25.781,62.611 48.26,62.611 50.419,64.77 49.073,66.116 46.685,66.116 45.339,64.77 41.529,68.58 38.989,68.58 35.179,72.39 ; 2.413,69.215 2.413,70.866 3.556,72.009 4.699,72.009 5.715,73.025 7.366,73.025 8.001,72.39 23.622,72.39 24.968,73.736 32.258,73.736 32.588,73.406 32.588,66.116 31.242,64.77 ; 3.81,97.155 5.944,95.021 43.993,95.021 44.577,94.437 46.025,94.437 47.752,92.71 ; 3.81,99.695 4.953,98.552 12.167,98.552 12.294,98.425 34.048,98.425 35.318,99.695 36.703,99.695 ; 3.937,35.687 6.071,33.553 44.12,33.553 44.704,32.969 46.152,32.969 47.879,31.242 ; 3.937,38.227 5.08,37.084 12.294,37.084 12.421,36.957 34.175,36.957 35.445,38.227 36.83,38.227 ; 3.937,56.261 6.071,54.127 44.12,54.127 44.704,53.543 46.152,53.543 47.879,51.816 ; 3.937,58.801 5.08,57.658 12.294,57.658 12.421,57.531 34.175,57.531 35.445,58.801 36.83,58.801 ; 3.937,76.835 6.071,74.701 44.12,74.701 44.704,74.117 46.152,74.117 47.879,72.39 ; 3.937,79.375 5.08,78.232 12.294,78.232 12.421,78.105 34.175,78.105 35.445,79.375 36.83,79.375 ; 5.588,85.725 6.604,85.725 8.585,87.706 12.323,87.706 14.01,86.019 ; 5.715,24.257 6.731,24.257 8.712,26.238 12.45,26.238 14.137,24.551 ; 5.715,44.831 6.731,44.831 8.712,46.812 12.45,46.812 14.137,45.125 ; 5.715,65.405 6.731,65.405 8.712,67.386 12.45,67.386 14.137,65.699 ; 9.779,91.4 11.684,91.4 12.065,91.019 14.01,91.019 17.958,87.071 24.054,87.071 26.035,85.09 ; 9.906,29.932 11.811,29.932 12.192,29.551 14.137,29.551 18.085,25.603 24.181,25.603 26.162,23.622 ; 9.906,50.506 11.811,50.506 12.192,50.125 14.137,50.125 18.085,46.177 24.181,46.177 26.162,44.196 ; 9.906,71.08 11.811,71.08 12.192,70.699 14.137,70.699 18.085,66.751 24.181,66.751 26.162,64.77 ; 10.414,97.282 11.811,95.885 33.401,95.885 35.445,97.929 35.445,98.425 48.26,98.425 52.578,94.107 54.178,94.107 54.178,91.338 50.648,91.338 50.292,91.694 50.292,92.71 ; 10.414,99.822 13.64,99.822 13.767,99.695 17.018,99.695 23.495,99.695 30.099,99.695 31.357,100.953 44.081,100.953 45.212,99.822 ; 10.541,35.814 11.938,34.417 33.528,34.417 35.572,36.461 35.572,36.957 48.387,36.957 52.705,32.639 54.305,32.639 54.305,29.87 50.775,29.87 50.419,30.226 50.419,31.242 ; 10.541,38.354 13.767,38.354 13.894,38.227 17.145,38.227 23.622,38.227 30.226,38.227 31.484,39.485 44.208,39.485 45.339,38.354 ; 10.541,56.388 11.938,54.991 33.528,54.991 35.572,57.035 35.572,57.531 48.387,57.531 52.705,53.213 54.305,53.213 54.305,50.444 50.775,50.444 50.419,50.8 50.419,51.816 ; 10.541,58.928 13.767,58.928 13.894,58.801 17.145,58.801 23.622,58.801 30.226,58.801 31.484,60.059 44.208,60.059 45.339,58.928 ; 10.541,76.962 11.938,75.565 33.528,75.565 35.572,77.609 35.572,78.105 48.387,78.105 52.705,73.787 54.305,73.787 54.305,71.018 50.775,71.018 50.419,71.374 50.419,72.39 ; 10.541,79.502 13.767,79.502 13.894,79.375 17.145,79.375 23.622,79.375 30.226,79.375 31.484,80.633 44.208,80.633 45.339,79.502 ; 19.01,88.519 24.384,88.519 28.575,92.71 ; 19.137,27.051 24.511,27.051 28.702,31.242 ; 19.137,47.625 24.511,47.625 28.702,51.816 ; 19.137,68.199 24.511,68.199 28.702,72.39 ; 28.575,85.09 29.972,83.693 46.355,83.693 47.752,85.09 ; 28.702,23.622 30.099,22.225 46.482,22.225 47.879,23.622 ; 28.702,44.196 30.099,42.799 46.482,42.799 47.879,44.196 ; 28.702,64.77 30.099,63.373 46.482,63.373 47.879,64.77 ; 35.052,85.09 33.706,86.436 33.706,93.726 34.036,94.056 43.866,94.056 45.212,92.71 ; 35.179,23.622 33.833,24.968 33.833,32.258 34.163,32.588 43.993,32.588 45.339,31.242 ; 35.179,44.196 33.833,45.542 33.833,52.832 34.163,53.162 43.993,53.162 45.339,51.816 ; 35.179,64.77 33.833,66.116 33.833,73.406 34.163,73.736 43.993,73.736 45.339,72.39 ; 36.703,97.155 36.982,97.434 48.108,97.434 52.832,92.71 ; 36.83,35.687 37.109,35.966 48.235,35.966 52.959,31.242 ; 36.83,56.261 37.109,56.54 48.235,56.54 52.959,51.816 ; 36.83,76.835 37.109,77.114 48.235,77.114 52.959,72.39 ; 37.592,92.71 40.132,92.71 ; 37.719,31.242 40.259,31.242 ; 37.719,51.816 40.259,51.816 ; 37.719,72.39 40.259,72.39 ; 59.69,10.414 59.69,13.64 59.817,13.767 59.817,17.018 59.817,23.495 59.817,30.099 58.559,31.357 58.559,44.081 59.69,45.212 ; 59.817,3.81 60.96,4.953 60.96,12.167 61.087,12.294 61.087,34.048 59.817,35.318 59.817,36.703 ; 62.23,10.414 63.627,11.811 63.627,33.401 61.583,35.445 61.087,35.445 61.087,48.26 65.405,52.578 65.405,54.178 68.174,54.178 68.174,50.648 67.818,50.292 66.802,50.292 ; 62.357,3.81 64.491,5.944 64.491,43.993 65.075,44.577 65.075,46.025 66.802,47.752 ; 62.357,36.703 62.078,36.982 62.078,48.108 66.802,52.832 ; 66.802,28.575 70.993,24.384 70.993,19.01 ; 66.802,35.052 70.612,38.862 70.612,41.402 74.422,45.212 73.076,46.558 73.076,48.946 74.422,50.292 76.581,48.133 76.581,25.654 74.422,23.495 74.422,19.202 74.879,18.745 74.879,11.546 73.112,9.779 75.184,7.707 75.184,4.953 72.517,2.286 ; 66.802,37.592 66.802,40.132 ; 66.802,45.212 65.456,43.866 65.456,34.036 65.786,33.706 73.076,33.706 74.422,35.052 ; 68.112,9.779 68.112,11.684 68.493,12.065 68.493,14.01 72.441,17.958 72.441,24.054 74.422,26.035 ; 69.977,2.286 68.326,2.286 67.183,3.429 67.183,4.572 66.167,5.588 66.167,7.239 66.802,7.874 66.802,23.495 65.456,24.841 65.456,32.131 65.786,32.461 73.076,32.461 74.422,31.115 ; 73.493,14.01 71.806,12.323 71.806,8.585 73.787,6.604 73.787,5.588 ; 74.422,28.575 75.819,29.972 75.819,46.355 74.422,47.752 ; 81.026,10.414 81.026,13.64 81.153,13.767 81.153,17.018 81.153,23.495 81.153,30.099 79.895,31.357 79.895,44.081 81.026,45.212 ; 81.153,3.81 82.296,4.953 82.296,12.167 82.423,12.294 82.423,34.048 81.153,35.318 81.153,36.703 ; 83.566,10.414 84.963,11.811 84.963,33.401 82.919,35.445 82.423,35.445 82.423,48.26 86.741,52.578 86.741,54.178 89.51,54.178 89.51,50.648 89.154,50.292 88.138,50.292 ; 83.693,3.81 85.827,5.944 85.827,43.993 86.411,44.577 86.411,46.025 88.138,47.752 ; 83.693,36.703 83.414,36.982 83.414,48.108 88.138,52.832 ; 88.138,28.575 92.329,24.384 92.329,19.01 ; 88.138,35.052 91.948,38.862 91.948,41.402 95.758,45.212 94.412,46.558 94.412,48.946 95.758,50.292 97.917,48.133 97.917,25.654 95.758,23.495 95.758,19.202 96.215,18.745 96.215,11.546 94.448,9.779 96.52,7.707 96.52,4.953 93.853,2.286 ; 88.138,37.592 88.138,40.132 ; 88.138,45.212 86.792,43.866 86.792,34.036 87.122,33.706 94.412,33.706 95.758,35.052 ; 89.448,9.779 89.448,11.684 89.829,12.065 89.829,14.01 93.777,17.958 93.777,24.054 95.758,26.035 ; 91.313,2.286 89.662,2.286 88.519,3.429 88.519,4.572 87.503,5.588 87.503,7.239 88.138,7.874 88.138,23.495 86.792,24.841 86.792,32.131 87.122,32.461 94.412,32.461 95.758,31.115 ; 94.829,14.01 93.142,12.323 93.142,8.585 95.123,6.604 95.123,5.588 ; 95.758,28.575 97.155,29.972 97.155,46.355 95.758,47.752
  Bottom Layer w0.762: 62.865,76.057 65.024,76.057 66.802,77.835 74.422,77.835 75.184,77.073 75.184,75.295 73.152,73.263 ; 62.865,99.298 65.024,99.298 66.802,101.076 74.422,101.076 75.184,100.314 75.184,98.536 73.152,96.504 ; 63.246,57.896 68.199,57.896 69.088,57.007 71.882,57.007 72.771,57.896 74.295,59.42 74.295,63.103 73.112,64.286 72.898,64.286 ; 63.246,60.436 63.246,61.706 61.341,63.611 61.341,70.469 61.341,71.993 62.865,73.517 68.072,73.517 ; 63.246,81.137 68.199,81.137 69.088,80.248 71.882,80.248 72.771,81.137 74.295,82.661 74.295,86.344 73.112,87.527 72.898,87.527 ; 63.246,83.677 63.246,84.947 61.341,86.852 61.341,93.71 61.341,95.234 62.865,96.758 68.072,96.758 ; 63.921,67.04 65.532,67.04 68.961,63.611 70.866,61.706 70.866,59.166 ; 63.921,90.281 65.532,90.281 68.961,86.852 70.866,84.947 70.866,82.407 ; 68.072,76.057 72.898,76.057 73.152,75.803 ; 68.072,99.298 72.898,99.298 73.152,99.044 ; 71.247,74.533 71.247,72.882 68.961,70.596 68.961,70.469 70.144,69.286 72.898,69.286 ; 71.247,97.774 71.247,96.123 68.961,93.837 68.961,93.71 70.144,92.527 72.898,92.527 ; 84.074,76.057 86.233,76.057 88.011,77.835 95.631,77.835 96.393,77.073 96.393,75.295 94.361,73.263 ; 84.074,99.298 86.233,99.298 88.011,101.076 95.631,101.076 96.393,100.314 96.393,98.536 94.361,96.504 ; 84.455,57.896 89.408,57.896 90.297,57.007 93.091,57.007 93.98,57.896 95.504,59.42 95.504,63.103 94.321,64.286 94.107,64.286 ; 84.455,60.436 84.455,61.706 82.55,63.611 82.55,70.469 82.55,71.993 84.074,73.517 89.281,73.517 ; 84.455,81.137 89.408,81.137 90.297,80.248 93.091,80.248 93.98,81.137 95.504,82.661 95.504,86.344 94.321,87.527 94.107,87.527 ; 84.455,83.677 84.455,84.947 82.55,86.852 82.55,93.71 82.55,95.234 84.074,96.758 89.281,96.758 ; 85.13,67.04 86.741,67.04 90.17,63.611 92.075,61.706 92.075,59.166 ; 85.13,90.281 86.741,90.281 90.17,86.852 92.075,84.947 92.075,82.407 ; 89.281,76.057 94.107,76.057 94.361,75.803 ; 89.281,99.298 94.107,99.298 94.361,99.044 ; 92.456,74.533 92.456,72.882 90.17,70.596 90.17,70.469 91.353,69.286 94.107,69.286 ; 92.456,97.774 92.456,96.123 90.17,93.837 90.17,93.71 91.353,92.527 94.107,92.527

## Keep-outs
Keep-Out Layer:
  the board outline again, w0.2

## Silkscreen, mask and mechanical layers (free items; w line width, h text height)
Top Overlay:
  lines w0.254: 22.352,5.969 ccw(c22.288,6.921) 23.241,6.985 ccw(c22.225,7.112) 22.352,8.128 ; 22.352,87.884 ccw(c22.288,88.836) 23.241,88.9 ccw(c22.225,89.027) 22.352,90.043 ; 22.479,26.416 ccw(c22.415,27.368) 23.368,27.432 ccw(c22.352,27.559) 22.479,28.575 ; 22.479,46.99 ccw(c22.415,47.942) 23.368,48.006 ccw(c22.352,48.133) 22.479,49.149 ; 22.479,67.564 ccw(c22.415,68.516) 23.368,68.58 ccw(c22.352,68.707) 22.479,69.723 ; 53.721,87.757 cw(c53.848,88.773) 52.832,88.9 cw(c53.785,88.964) 53.721,89.916 ; 53.848,6.096 cw(c53.911,6.921) 53.086,6.985 cw(c53.886,6.947) 53.924,7.747 ; 53.848,26.162 cw(c53.975,27.178) 52.959,27.305 cw(c53.911,27.369) 53.848,28.321 ; 53.848,46.99 cw(c53.975,48.006) 52.959,48.133 cw(c53.911,48.197) 53.848,49.149 ; 53.848,67.437 cw(c53.975,68.453) 52.959,68.58 cw(c53.911,68.644) 53.848,69.596 ; 58.166,55.88 76.143,55.88 ; 58.166,55.984 58.166,78.486 76.2,78.486 ; 58.166,79.121 76.143,79.121 ; 58.166,79.225 58.166,101.727 76.2,101.727 ; 69.596,22.352 cw(c70.612,22.225) 70.739,23.241 cw(c70.803,22.288) 71.755,22.352 ; 69.596,53.721 ccw(c70.548,53.785) 70.612,52.832 ccw(c70.739,53.848) 71.755,53.721 ; 76.2,55.88 76.2,78.484 ; 76.2,79.121 76.2,101.725 ; 79.375,55.88 97.352,55.88 ; 79.375,55.984 79.375,78.486 97.409,78.486 ; 79.375,79.121 97.352,79.121 ; 79.375,79.225 79.375,101.727 97.409,101.727 ; 90.805,22.352 cw(c91.821,22.225) 91.948,23.241 cw(c92.012,22.288) 92.964,22.352 ; 90.932,53.594 ccw(c91.884,53.657) 91.948,52.705 ccw(c92.075,53.721) 93.091,53.594 ; 97.409,55.88 97.409,78.484 ; 97.409,79.121 97.409,101.725 ; 0.381,82.55 0.381,101.473 54.864,101.473 54.864,82.55 0.381,82.55 ; 0.508,0.635 54.991,0.635 54.991,19.558 0.508,19.558 0.508,0.635 ; 0.508,21.082 0.508,40.005 54.991,40.005 54.991,21.082 0.508,21.082 ; 0.508,41.656 0.508,60.579 54.991,60.579 54.991,41.656 0.508,41.656 ; 0.508,62.23 0.508,81.153 54.991,81.153 54.991,62.23 0.508,62.23 ; 58.039,0.381 58.039,54.864 76.962,54.864 76.962,0.381 58.039,0.381 ; 79.375,0.381 79.375,54.864 98.298,54.864 98.298,0.381 79.375,0.381
  text "3V" at 70.739,99.679 h1 r90
  text "3V" at 91.948,99.679 h1 r90
  text "100" at 47.625,99.314 h1
  text "-" at 66.929,99.298 h1 r90
  text "-" at 88.138,99.298 h1 r90
  text "-" at 8.255,99.06 h1.52
  text "-" at 1.651,98.933 h1.52
  text "-" at 14.986,98.933 h1.52
  text "-" at 21.463,98.933 h1.52
  text "-" at 27.94,98.933 h1.52
  text "-" at 34.544,98.933 h1.52
  text "-" at 61.849,98.917 h1 r90
  text "-" at 83.058,98.917 h1 r90
  text "LED" at 59.436,97.012 h1 r90
  text "LED" at 80.645,97.012 h1 r90
  text "+" at 1.651,96.52 h1.5
  text "+" at 8.382,96.52 h1.5
  text "+" at 61.722,96.504 h1 r90
  text "+" at 82.931,96.504 h1 r90
  text "+" at 14.986,96.393 h1.5
  text "+" at 21.336,96.393 h1.5
  text "+" at 27.94,96.393 h1.5
  text "+" at 34.671,96.393 h1.5
  text "+" at 66.675,95.615 h1 r90
  text "+" at 87.884,95.615 h1 r90
  text "220" at 47.625,95.504 h1
  text "2N2222" at 75.819,94.726 h1 r90
  text "2N2222" at 97.028,94.726 h1 r90
  text "33K" at 65.913,94.218 h1 r180
  text "33K" at 87.122,94.218 h1 r180
  text "A.I. PCB" at 7.366,92.837 h1.6
  text "9V" at 0.889,92.456 h2
  text "+" at 1.778,91.059 h1.5
  text "+" at 7.747,90.678 h1.5
  text "-" at 73.406,90.662 h1 r90
  text "-" at 94.615,90.662 h1 r90
  text "+" at 68.072,90.027 h1 r90
  text "+" at 89.281,90.027 h1 r90
  text "-" at 65.405,89.773 h1 r90
  text "-" at 86.614,89.773 h1 r90
  text "100U" at 66.802,88.884 h0.8 r90
  text "100U" at 88.011,88.884 h0.8 r90
  text "100U" at 72.517,88.757 h0.8 r90
  text "+" at 73.406,88.757 h1 r90
  text "100U" at 93.726,88.757 h0.8 r90
  text "+" at 94.615,88.757 h1 r90
  text "10K" at 6.096,88.011 h1 r90
  text "NE555" at 23.622,88.011 h1.8
  text "CD4017" at 38.354,87.884 h2
  text "100K" at 13.335,87.63 h1.4
  text "10u" at 10.16,87.503 h1 r90
  text "33K" at 66.294,87.36 h1 r180
  text "33K" at 87.503,87.36 h1 r180
  text "A.I. PCB" at 59.69,86.979 h1 r90
  text "A.I. PCB" at 80.899,86.979 h1 r90
  text "-" at 7.62,85.598 h1.52
  text "-" at 1.651,84.455 h1.52
  text "+" at 62.23,83.296 h1 r90
  text "+" at 83.439,83.296 h1 r90
  text "KNIGHT RIDER" at 3.048,83.058 h1.7
  text "-" at 62.357,81.518 h1 r90
  text "-" at 83.566,81.518 h1 r90
  text "LED" at 59.817,80.883 h1 r90
  text "LED" at 81.026,80.883 h1 r90
  text "2N2222" at 75.819,79.486 h1 r90
  text "2N2222" at 97.028,79.486 h1 r90
  text "100" at 47.752,78.994 h1
  text "-" at 8.382,78.74 h1.52
  text "-" at 1.778,78.613 h1.52
  text "-" at 15.113,78.613 h1.52
  text "-" at 21.59,78.613 h1.52
  text "-" at 28.067,78.613 h1.52
  text "-" at 34.671,78.613 h1.52
  text "3V" at 70.739,76.438 h1 r90
  text "3V" at 91.948,76.438 h1 r90
  text "+" at 1.778,76.2 h1.5
  text "+" at 8.509,76.2 h1.5
  text "+" at 15.113,76.073 h1.5
  text "+" at 21.463,76.073 h1.5
  text "+" at 28.067,76.073 h1.5
  text "+" at 34.798,76.073 h1.5
  text "-" at 66.929,76.057 h1 r90
  text "-" at 88.138,76.057 h1 r90
  text "-" at 61.849,75.676 h1 r90
  text "-" at 83.058,75.676 h1 r90
  text "220" at 47.752,75.184 h1
  text "LED" at 59.436,73.771 h1 r90
  text "LED" at 80.645,73.771 h1 r90
  text "+" at 61.722,73.263 h1 r90
  text "+" at 82.931,73.263 h1 r90
  text "A.I. PCB" at 7.493,72.517 h1.6
  text "+" at 66.675,72.374 h1 r90
  text "+" at 87.884,72.374 h1 r90
  text "9V" at 1.016,72.136 h2
  text "2N2222" at 75.819,71.485 h1 r90
  text "2N2222" at 97.028,71.485 h1 r90
  text "33K" at 65.913,70.977 h1 r180
  text "33K" at 87.122,70.977 h1 r180
  text "+" at 1.905,70.739 h1.5
  text "+" at 7.874,70.358 h1.5
  text "NE555" at 23.749,67.818 h1.8
  text "10K" at 6.223,67.691 h1 r90
  text "CD4017" at 38.481,67.564 h2
  text "-" at 73.406,67.421 h1 r90
  text "-" at 94.615,67.421 h1 r90
  text "100K" at 13.462,67.31 h1.4
  text "10u" at 10.287,67.183 h1 r90
  text "+" at 68.072,66.786 h1 r90
  text "+" at 89.281,66.786 h1 r90
  text "-" at 65.405,66.532 h1 r90
  text "-" at 86.614,66.532 h1 r90
  text "100U" at 66.802,65.643 h0.8 r90
  text "100U" at 88.011,65.643 h0.8 r90
  text "100U" at 72.517,65.516 h0.8 r90
  text "+" at 73.406,65.516 h1 r90
  text "100U" at 93.726,65.516 h0.8 r90
  text "+" at 94.615,65.516 h1 r90
  text "-" at 7.747,65.278 h1.52
  text "-" at 1.778,64.135 h1.52
  text "33K" at 66.294,64.119 h1 r180
  text "33K" at 87.503,64.119 h1 r180
  text "A.I. PCB" at 59.69,63.738 h1 r90
  text "A.I. PCB" at 80.899,63.738 h1 r90
  text "KNIGHT RIDER" at 3.175,62.738 h1.7
  text "+" at 62.23,60.055 h1 r90
  text "+" at 83.439,60.055 h1 r90
  text "100" at 47.752,58.42 h1
  text "-" at 62.357,58.277 h1 r90
  text "-" at 83.566,58.277 h1 r90
  text "-" at 8.382,58.166 h1.52
  text "-" at 1.778,58.039 h1.52
  text "-" at 15.113,58.039 h1.52
  text "-" at 21.59,58.039 h1.52
  text "-" at 28.067,58.039 h1.52
  text "-" at 34.671,58.039 h1.52
  text "LED" at 59.817,57.642 h1 r90
  text "LED" at 81.026,57.642 h1 r90
  text "2N2222" at 75.819,56.245 h1 r90
  text "2N2222" at 97.028,56.245 h1 r90
  text "+" at 1.778,55.626 h1.5
  text "+" at 8.509,55.626 h1.5
  text "+" at 15.113,55.499 h1.5
  text "+" at 21.463,55.499 h1.5
  text "+" at 28.067,55.499 h1.5
  text "+" at 34.798,55.499 h1.5
  text "220" at 47.752,54.61 h1
  text "A.I. PCB" at 7.493,51.943 h1.6
  text "9V" at 1.016,51.562 h2
  text "+" at 1.905,50.165 h1.5
  text "+" at 7.874,49.784 h1.5
  text "100" at 60.198,47.625 h1 r90
  text "220" at 64.008,47.625 h1 r90
  text "100" at 81.534,47.625 h1 r90
  text "220" at 85.344,47.625 h1 r90
  text "NE555" at 23.749,47.244 h1.8
  text "10K" at 6.223,47.117 h1 r90
  text "CD4017" at 38.481,46.99 h2
  text "100K" at 13.462,46.736 h1.4
  text "10u" at 10.287,46.609 h1 r90
  text "-" at 7.747,44.704 h1.52
  text "-" at 1.778,43.561 h1.52
  text "KNIGHT RIDER" at 3.175,42.164 h1.7
  text "CD4017" at 71.628,38.354 h2 r90
  text "CD4017" at 92.964,38.354 h2 r90
  text "100" at 47.752,37.846 h1
  text "-" at 8.382,37.592 h1.52
  text "-" at 1.778,37.465 h1.52
  text "-" at 15.113,37.465 h1.52
  text "-" at 21.59,37.465 h1.52
  text "-" at 28.067,37.465 h1.52
  text "-" at 34.671,37.465 h1.52
  text "+" at 1.778,35.052 h1.5
  text "+" at 8.509,35.052 h1.5
  text "+" at 15.113,34.925 h1.5
  text "+" at 21.463,34.925 h1.5
  text "+" at 28.067,34.925 h1.5
  text "+" at 34.798,34.925 h1.5
  text "+" at 63.119,34.671 h1.5 r90
  text "+" at 84.455,34.671 h1.5 r90
  text "-" at 60.579,34.544 h1.52 r90
  text "-" at 81.915,34.544 h1.52 r90
  text "220" at 47.752,34.036 h1
  text "A.I. PCB" at 7.493,31.369 h1.6
  text "9V" at 1.016,30.988 h2
  text "+" at 1.905,29.591 h1.5
  text "+" at 7.874,29.21 h1.5
  text "-" at 60.579,27.94 h1.52 r90
  text "+" at 63.119,27.94 h1.5 r90
  text "-" at 81.915,27.94 h1.52 r90
  text "+" at 84.455,27.94 h1.5 r90
  text "10K" at 6.223,26.543 h1 r90
  text "NE555" at 23.749,26.543 h1.8
  text "CD4017" at 38.481,26.416 h2
  text "100K" at 13.462,26.162 h1.4
  text "10u" at 10.287,26.035 h1 r90
  text "-" at 7.747,24.13 h1.52
  text "NE555" at 71.501,23.622 h1.8 r90
  text "NE555" at 92.837,23.622 h1.8 r90
  text "-" at 1.778,22.987 h1.52
  text "KNIGHT RIDER" at 3.175,21.59 h1.7
  text "-" at 60.579,21.463 h1.52 r90
  text "-" at 81.915,21.463 h1.52 r90
  text "+" at 63.119,21.336 h1.5 r90
  text "+" at 84.455,21.336 h1.5 r90
  text "100" at 47.752,17.399 h1
  text "-" at 8.382,17.145 h1.52
  text "-" at 1.778,17.018 h1.52
  text "-" at 15.113,17.018 h1.52
  text "-" at 21.59,17.018 h1.52
  text "-" at 28.067,17.018 h1.52
  text "-" at 34.671,17.018 h1.52
  text "-" at 60.579,14.986 h1.52 r90
  text "+" at 63.119,14.986 h1.5 r90
  text "-" at 81.915,14.986 h1.52 r90
  text "+" at 84.455,14.986 h1.5 r90
  text "+" at 1.778,14.605 h1.5
  text "+" at 8.509,14.605 h1.5
  text "+" at 15.113,14.478 h1.5
  text "+" at 21.463,14.478 h1.5
  text "+" at 28.067,14.478 h1.5
  text "+" at 34.798,14.478 h1.5
  text "220" at 47.752,13.589 h1
  text "100K" at 71.882,13.335 h1.4 r90
  text "100K" at 93.218,13.335 h1.4 r90
  text "A.I. PCB" at 7.493,10.922 h1.6
  text "9V" at 1.016,10.541 h2
  text "10u" at 72.009,10.16 h1 r180
  text "10u" at 93.345,10.16 h1 r180
  text "+" at 1.905,9.144 h1.5
  text "+" at 7.874,8.763 h1.5
  text "+" at 62.992,8.382 h1.5 r90
  text "+" at 84.328,8.382 h1.5 r90
  text "-" at 60.452,8.255 h1.52 r90
  text "-" at 81.788,8.255 h1.52 r90
  text "+" at 68.834,7.747 h1.5 r90
  text "+" at 90.17,7.747 h1.5 r90
  text "-" at 73.914,7.62 h1.52 r90
  text "-" at 95.25,7.62 h1.52 r90
  text "A.I. PCB" at 66.675,7.366 h1.6 r90
  text "A.I. PCB" at 88.011,7.366 h1.6 r90
  text "10K" at 6.223,6.096 h1 r90
  text "NE555" at 23.749,6.096 h1.8
  text "10K" at 71.501,6.096 h1 r180
  text "10K" at 92.837,6.096 h1 r180
  text "CD4017" at 38.481,5.969 h2
  text "100K" at 13.462,5.715 h1.4
  text "10u" at 10.287,5.588 h1 r90
  text "-" at 7.747,3.683 h1.52
  text "KNIGHT RIDER" at 76.454,3.048 h1.7 r90
  text "KNIGHT RIDER" at 97.79,3.048 h1.7 r90
  text "-" at 1.778,2.54 h1.52
  text "+" at 68.453,1.778 h1.5 r90
  text "+" at 89.789,1.778 h1.5 r90
  text "-" at 60.579,1.651 h1.52 r90
  text "+" at 62.992,1.651 h1.5 r90
  text "-" at 75.057,1.651 h1.52 r90
  text "-" at 81.915,1.651 h1.52 r90
  text "+" at 84.328,1.651 h1.5 r90
  text "-" at 96.393,1.651 h1.52 r90
  text "KNIGHT RIDER" at 3.175,1.143 h1.7
  text "9V" at 67.056,0.889 h2 r90
  text "9V" at 88.392,0.889 h2 r90
Bottom Overlay:
  text "A.I. PCB" at 59.69,94.218 h1 r90
  text "A.I. PCB" at 80.899,94.218 h1 r90
  text "A.I. PCB" at 21.336,92.837 h2
  text "A.I. PCB" at 21.59,72.644 h2
  text "A.I. PCB" at 59.69,70.977 h1 r90
  text "A.I. PCB" at 80.899,70.977 h1 r90
  text "A.I. PCB" at 21.717,51.943 h2
  text "A.I. PCB" at 21.336,31.242 h2
  text "A.I. PCB" at 66.802,21.336 h2 r90
  text "A.I. PCB" at 88.138,21.336 h2 r90
  text "A.I. PCB" at 21.59,10.922 h2